# Altium PCB OpticalProbeTest.PcbDoc
Units mm, origin at the board's own origin, x right, y up, seen from the top; angles counter-clockwise.
Board outline 50 x 37 mm, 2 copper layers (Top Layer, Bottom Layer); 35 components, 18 nets, 103 pads, 27 vias.
Unrouted connection lines stored in the file: 3.
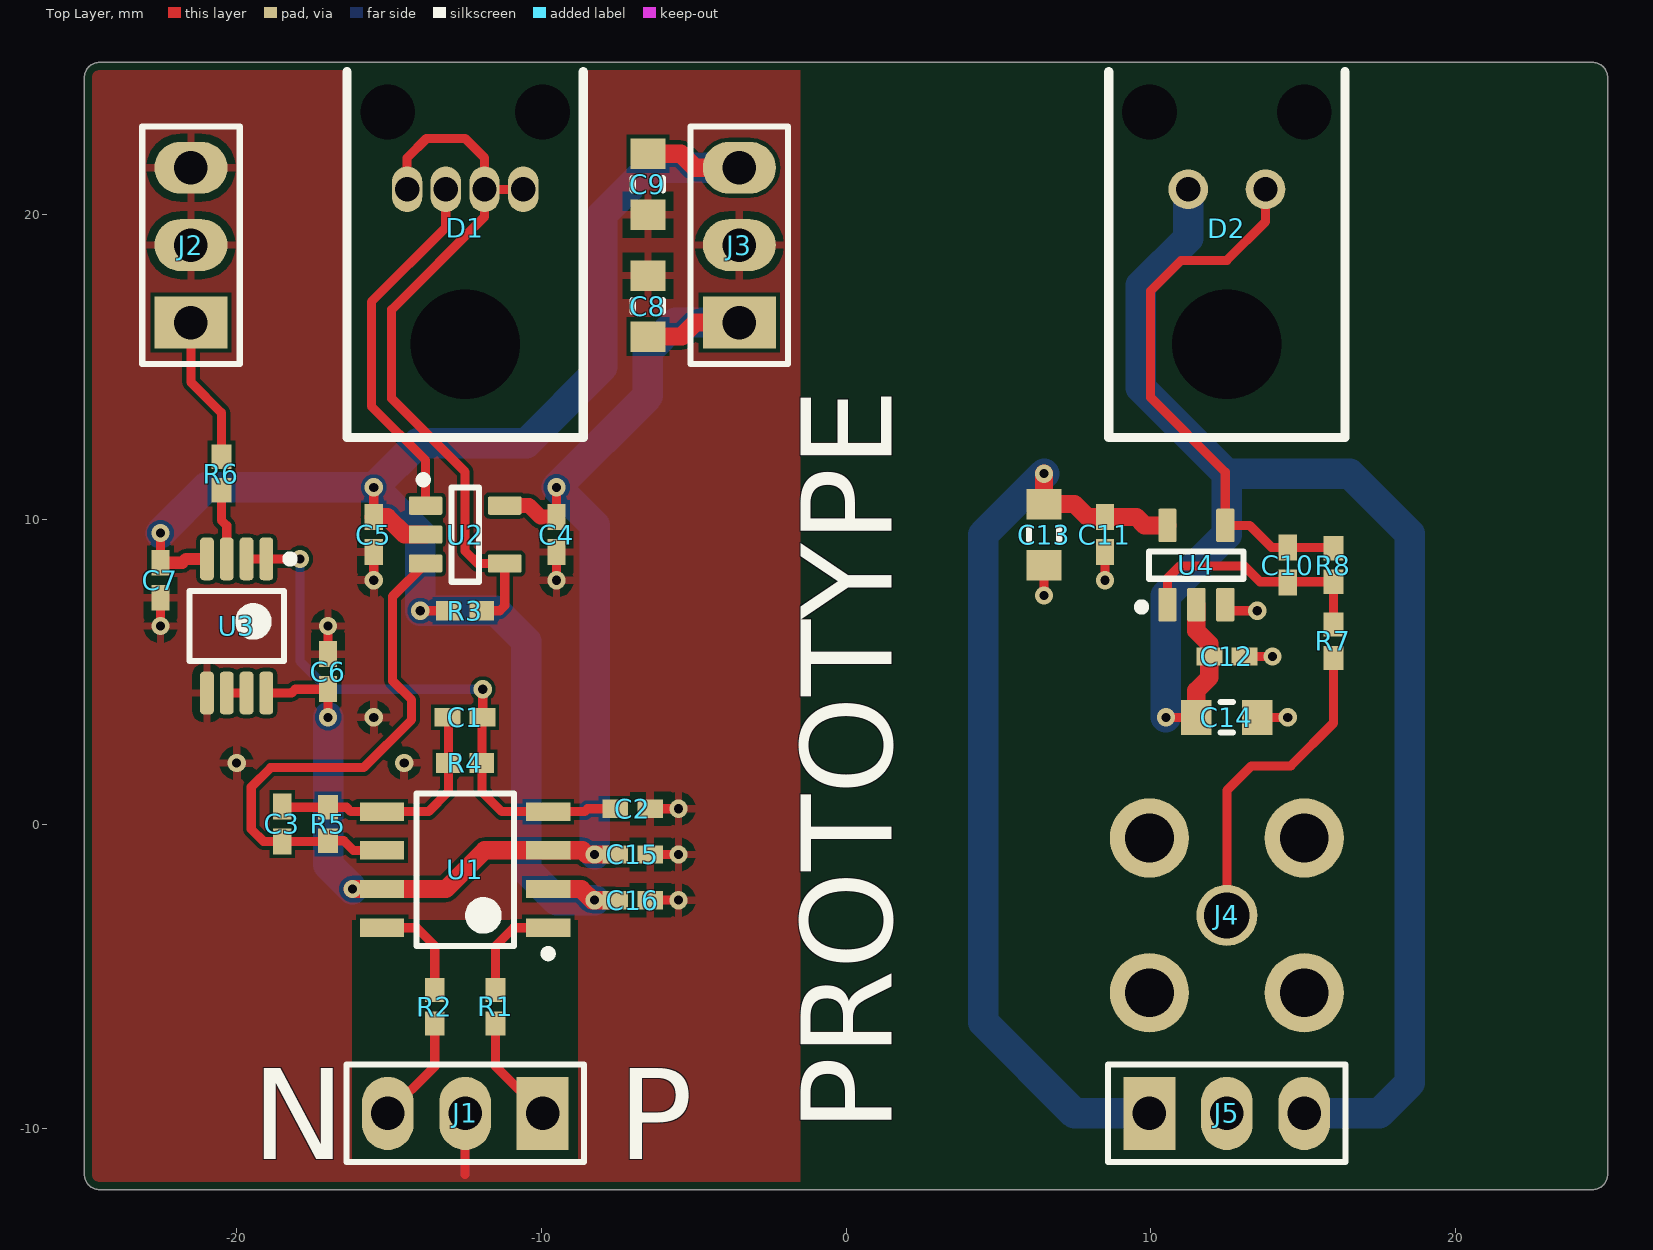
[diagram p0: Top Layer view]
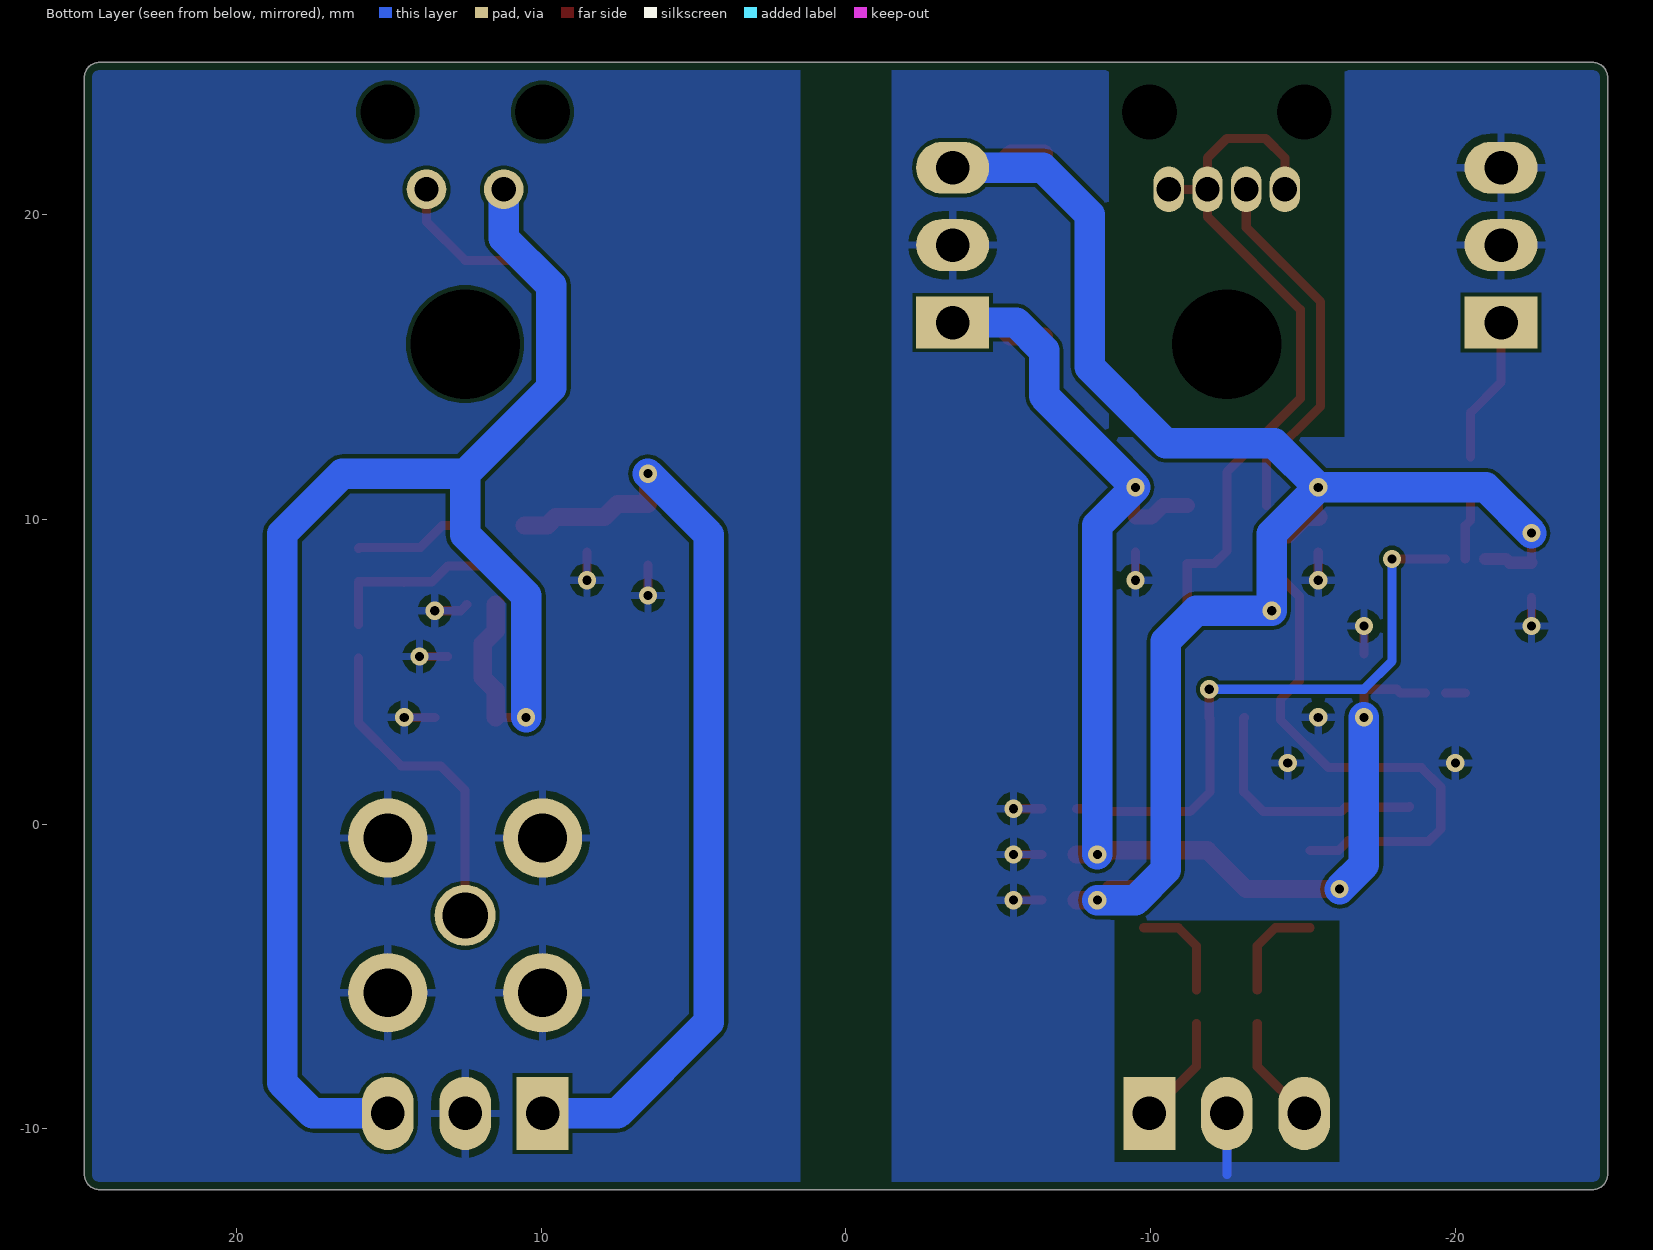
[diagram p1: Bottom Layer view, seen from below]

## Layer stack, top to bottom
Top Solder: solder mask 0.0102, Solder Resist, Dk 3.5
Top Layer: signal copper 0.0356
Dielectric 1: dielectric 0.32, FR-4, Dk 4.8
Bottom Layer: signal copper 0.0356
Bottom Solder: solder mask 0.0102, Solder Resist, Dk 3.5

## Board outline
-25,-11.5 ccw(c-24.5,-11.5) -24.5,-12 24.5,-12 ccw(c24.5,-11.5) 25,-11.5 25,24.5 ccw(c24.5,24.5) 24.5,25 -24.5,25 ccw(c-24.5,24.5) -25,24.5

## Design rules (kind name [scope] priority, off if disabled: settings)
BoardOutlineClearance [All] p1: gap=0.254 ignorepadtopadclearanceinfootprint=FALSE except(0: Arc-SplitContinuation Track-SplitContinuation SMDPad-SplitContinuation THPad-SplitContinuation Via-SplitContinuation Fill-SplitContinuation Poly-SplitContinuation Region-SplitContinuation Text-SplitContinuation)
Clearance [All] p1: gap=0.127 ignorepadtopadclearanceinfootprint=FALSE
HoleSize [All] p1: absolutevalues=TRUE maxlimit=6 minlimit=0.025 maxpercent=80.000 minpercent=20.000
PolygonConnect [All] p1: connectstyle=Relief reliefconductorwidth=0.254 reliefentries=4 polygonreliefangle="90 Angle" airgapwidth=0.254
RoutingVias [All] p1: holewidth=0.711 width=1.27 viastyle="Through Hole" minholewidth=0.711 minwidth=1.27 maxholewidth=0.711 maxwidth=1.27
SolderMaskExpansion [All] p1: expansion=0.102 istentingtop=FALSE
Width [All] p1: maxlimit=2.54 minlimit=0.254 preferedwidth=0.254 minimp=50.000000 maximp=50.000000 favimp=50.000000
29 further rules are at their usual default settings.

## Components (designator, comment, footprint, x,y, rotation, side; value= is the part's Value field where it differs from the comment)
C1 "18p" CAPC1005X06N -12.5,3.5 r180 top
C2 "100n" CAPC1005X06N -7,0.5 r180 top
C3 "1.2p" CAPC1005X06N -18.5,0 r90 top
C4 "100n" CAPC1005X06N -9.5,9.5 r90 top
C5 "100n" CAPC1005X06N -15.5,9.5 r90 top
C6 "100n" CAPC1005X06N -17,5 r270 top
C7 "100n" CAPC1005X06N -22.5,8 r90 top
C8 "100n" CAPC_0805 -6.5,17 r270 top
C9 "100n" CAPC_0805 -6.5,21 r90 top
C10 "1.2p" CAPC1005X06N 14.5,8.5 r90 top
C11 "100n" CAPC1005X06N 8.5,9.5 r90 top
C12 "100n" CAPC1005X06N 12.5,5.5 r180 top
C13 "100n" CAPC_0805 6.5,9.5 r90 top
C14 "100n" CAPC_0805 12.5,3.5 r180 top
C15 "100n" CAPC1005X06N -7,-1 r180 top
C16 "100n" CAPC1005X06N -7,-2.5 r180 top
D1 "IF-E99B" INDUSTRIALFIBEROPTICS_IF-E99B -12.5,20.83 r0 top
D2 "IF D91B" INDUSTRIALFIBEROPTICS_IF-D91B 12.5,20.83 r0 top
J1 "61300311121" WURTH_61300311121 -12.5,-9.5 r180 top
J2 "61300311121" WURTH_61300311121 -21.5,19 r90 top
J3 "61300311121" WURTH_61300311121 -3.5,19 r90 top
J4 "5-1814832-2" TE_5-1814832-2 12.5,-3 r0 top
J5 "61300311121" WURTH_61300311121 12.5,-9.5 r0 top
R1 "10R" RESC1005X04N -11.5,-6 r90 top
R2 "10R" RESC1005X04N -13.5,-6 r90 top
R3 "220R" RESC1005X04N -12.5,7 r0 top
R4 "220R" RESC1005X04N -12.5,2 r180 top
R5 "2k2,0.1%" RESC1005X04N -17,0 r270 top
R6 "0R" RESC1005X04N -20.5,11.5 r270 top
R7 "49R9,1%,0.063W,0402" RESC1005X04N 16,6 r270 top value=49R9
R8 "2k2,0.1%" RESC1005X04N 16,8.5 r270 top
U1 "AD8129ARZ" ANALOGDEVICES_PKG_R-8 -12.5,-1.5 r180 top
U2 "OPA659IDBVT" TEXASINSTRUMENTS_PKG_DBV0005A -12.5,9.5 r0 top
U3 "LM7332MMX/NOPB" TEXASINSTRUMENTS_PKG_DGK0008A -20,6.5 r270 top
U4 "OPA659IDBVT" TEXASINSTRUMENTS_PKG_DBV0005A 11.5,8.5 r90 top

## Footprints (in the part's own frame and the unit in brackets; to place one, negate y for a bottom-side part, rotate by r counter-clockwise, add the part's x,y. Pads: shape width x height; smd on the part's side, far side on the other; paste and mask are expansions set on the pad)
ANALOGDEVICES_PKG_R-8 [mm]
  rect 1.45x0.6 smd: 1(-2.725,1.905) 2(-2.725,0.635) 3(-2.725,-0.635) 4(-2.725,-1.905) 5(2.725,-1.905) 6(2.725,-0.635) 7(2.725,0.635) 8(2.725,1.905)
  silkscreen extent -2.85,-2.5 1.6,2.88, body extent -2,-2.5 2,2.5, height 1.75
CAPC1005X06N [mm] "Chip Capacitor, 2-Leads, Body 1.0x0.5mm, IPC Medium Density"
  rect 0.85x0.6 smd: 1(-0.575,0) 2(0.575,0)
  body extent -0.53,-0.28 0.53,0.28, height 0.55
CAPC_0805 [mm] "CAPC_0805"
  rect 1x1.15 smd: 1(-1,0) 2(1,0)
  silkscreen extent -0.2,-0.5 0.2,0.5, body extent -1,-0.5 1,0.5, height 1.2
INDUSTRIALFIBEROPTICS_IF-D91B [mm]
  round 1.3 hole 0.8 mask+0: 1(-1.27,0) 2(1.27,0)
  round 0 hole 1.8 unplated mask+0: ""(-2.54,2.54) ""(2.54,2.54)
  round 0 hole 3.6 unplated mask+0: ""(0,-5.08)
  silkscreen extent -3.87,-8.14 3.87,3.86, body extent -4.31,-8.31 4.31,19.44, height 11.3
INDUSTRIALFIBEROPTICS_IF-E99B [mm]
  oval 1x1.5 hole 0.8 mask+0: 1(1.905,0) 2(0.635,0) 3(-0.635,0) 4(-1.905,0)
  round 0 hole 1.8 unplated mask+0: ""(-2.54,2.54) ""(2.54,2.54)
  round 0 hole 3.6 unplated mask+0: ""(0,-5.08)
  silkscreen extent -3.87,-8.14 3.87,3.86, body extent -4.32,-8.31 4.32,19.44, height 11.3
RESC1005X04N [mm] "Chip Resistor, 2-Leads, Body 1.0x0.5mm, IPC Medium Density"
  rect 0.8x0.65 smd: 1(-0.55,0) 2(0.55,0)
  body extent -0.52,-0.27 0.53,0.28, height 0.4
TE_5-1814832-2 [mm] "TE_5-1814832-2"
  round 2 hole 1.5: 1(0,0)
  round 2.6 hole 1.6: 2(-2.54,-2.54) 2(-2.54,2.54) 2(2.54,-2.54) 2(2.54,2.54)
  body extent -3.16,-3.19 3.24,3.21, height 11
TEXASINSTRUMENTS_PKG_DBV0005A [mm] "SOT23, 5-Leads, Body 2.90x2.80mm, Pitch 0.95mm"
  rrect17% 1.1x0.6 smd mask+0.07: 1(-1.3,0.95) 2(-1.3,0) 3(-1.3,-0.95) 4(1.3,-0.95) 5(1.3,0.95)
  silkscreen extent -1.5,-1.55 0.45,1.92, body extent -1.4,-1.45 1.4,1.45, height 1.2
TEXASINSTRUMENTS_PKG_DGK0008A [mm]
  rrect50% 1.4x0.45 smd: 1(-2.2,0.975) 2(-2.2,0.325) 3(-2.2,-0.325) 4(-2.2,-0.975) 5(2.2,-0.975) 6(2.2,-0.325) 7(2.2,0.325) 8(2.2,0.975)
  silkscreen extent -2.32,-1.55 1.15,1.87, body extent -2.45,-1.55 2.45,1.55, height 1.1
WURTH_61300311121 [mm] "WURTH_61300311121"
  rect 1.7x2.4 hole 1.1 mask+0.05: 1(-2.54,0)
  oval 1.7x2.4 hole 1.1 mask+0.05: 2(0,0) 3(2.54,0)
  silkscreen extent -3.9,-1.6 3.9,1.6, body extent -3.81,-1.27 3.81,1.27, height 8.57

## Part data
C1: library part CAP,Cer,18pF,25VDC,C0G,0402, "18 pF ï¿½5% 25V Ceramic Capacitor C0G, NP0 0402 (1005 Metric)", Manufacturer 1="Walsin Technology Corporation", Manufacturer 1 Part Number=0402N180J250CT, Vendor 1 Part Number=1292-1265-1-ND, CreatedBy="Judd Foster", HelpURL=http://www.passivecomponent.com/wp-content/uploads/2018/10/MLCC.pdf, Part Name=CAP,Cer,18pF,25VDC,C0G,0402, Vendor 1=Digikey
C2 C4 C5 C6 C7 C11 C12 C15 C16: library part CAP,Cer,100nF,25VDC,X7R,0402, "0.1ï¿½F ï¿½10% 25V Ceramic Capacitor X7R 0402 (1005 Metric)", Manufacturer 1="Murata Electronics", Manufacturer 1 Part Number=GRM155R71E104KE14J, Vendor 1 Part Number=490-14603-1-ND, CreatedBy="Judd Foster", HelpURL=https://search.murata.co.jp/Ceramy/image/img/A01X/G101/ENG/GRM155R71E104KE14-01.pdf, Part Name=CAP,Cer,100nF,25VDC,X7R,0402, Vendor 1=Digikey
C3 C10: library part CAP,Cer,1.2pF,50V,C0G,0402, "1.2 pF ï¿½0.1pF 50V Ceramic Capacitor C0G, NP0 0402 (1005 Metric)", Manufacturer 1="Murata Electronics", Manufacturer 1 Part Number=GRM1555C1H1R2BA01D, Vendor 1 Part Number=490-6209-1-ND, CreatedBy="Judd Foster", HelpURL=https://search.murata.co.jp/Ceramy/image/img/A01X/G101/ENG/GRM1555C1H1R2BA01-01.pdf, Part Name=CAP,Cer,1.2pF,50V,C0G,0402, Vendor 1=Digikey
C8 C9 C13 C14: library part CAP,Cer,100nF,50VDC,X7R,0805, "CAP CER 0.1UF 50V X7R 0805", Manufacturer 1=KEMET, Manufacturer 1 Part Number=C0805C104M5RACTU, Vendor 1 Part Number=399-1169-1-ND, CreatedBy="Judd Foster", HelpURL=https://content.kemet.com/datasheets/KEM_C1002_X7R_SMD.pdf, Part Name=CAP,Cer,100nF,50VDC,X7R,0805, Vendor 1=Digikey
D1: library part "XMITTER,FIBER OPTIC,650NM,1.9V,IF-E99B", "Fiber Optic Transmitter 650nm 1.9V 50 mA Connector-less", Manufacturer 1="Industrial Fiber Optics", Vendor 1 Part Number=FB161-ND, CreatedBy="Judd Foster", HelpURL=https://i-fiberoptics.com/pdf/if-e99bdatasheet.pdf, Manufacturer 1 Part Number=IF-E99B, Part Name="XMITTER,FIBER OPTIC,650NM,1.9V,IF-E99B", Vendor 1=DigiKey
D2: library part "RECEIVER,FIBER OPTIC,450-1050NM,IF-D91B", "Fiber Optic Receiver General Purpose 100Mbps", Manufacturer 1="Industrial Fiber Optics", Vendor 1 Part Number=FB200-ND, CreatedBy="Judd Foster", HelpURL=https://i-fiberoptics.com/pdf/ifd91b-1809.pdf, Manufacturer 1 Part Number="IF D91B", Part Name="RECEIVER,FIBER OPTIC,450-1050NM,IF-D91B", Vendor 1=DigiKey
J1 J2 J3 J5: library part "Term,Header,3 Pin,Top,2.54mm", "CONN HEADER VERT 3POS 2.54MM", Manufacturer 1="Wï¿½rth Elektronik", Vendor 1 Part Number=732-5316-ND, CreatedBy="Judd Foster", HelpURL=https://katalog.we-online.de/em/datasheet/6130xx11121.pdf, Manufacturer 1 Part Number=61300311121, Part Name="Term,Header,3 Pin,Top,2.54mm", Vendor 1=Digikey
J4: library part Conn,RF,SMA,Fem,50R,Thru, "SMA Connector Jack, Female Socket 50Ohm Through Hole Solder", Manufacturer 1="TE Connectivity", Vendor 1 Part Number=C482015, CreatedBy="Judd Foster", HelpURL=https://datasheet.lcsc.com/lcsc/2003251910_TE-Connectivity-5-1814832-2_C482015.pdf, Manufacturer 1 Part Number=5-1814832-2, Part Name=Conn,RF,SMA,Fem,50R,Thru, Vendor 1=LCSC
R1 R2: library part RES,10R,1%,0.063W,0402, "10 Ohms ï¿½1% 0.063W, 1/16W Chip Resistor 0402 (1005 Metric) Automotive AEC-Q200 Thick Film", Manufacturer 1="Panasonic Electronic Components", Manufacturer 1 Part Number=ERJ-2RKF10R0X, Vendor 1 Part Number=P10.0LCT-ND, CreatedBy="Judd Foster", HelpURL=https://industrial.panasonic.com/cdbs/www-data/pdf/RDA0000/AOA0000C304.pdf, Part Name=RES,10R,1%,0.063W,0402, Vendor 1=Digikey
R3 R4: library part RES,220R,1%,0.063W,0402, "220 Ohms ï¿½1% 0.063W, 1/16W Chip Resistor 0402 (1005 Metric) Moisture Resistant Thick Film", Manufacturer 1=Yageo, Manufacturer 1 Part Number=RC0402FR-07220RL, Vendor 1 Part Number=311-220LRCT-ND, CreatedBy="Judd Foster", HelpURL=https://www.yageo.com/upload/media/product/productsearch/datasheet/rchip/PYu-RC_Group_51_RoHS_L_12.pdf, Part Name=RES,220R,1%,0.063W,0402, Vendor 1=Digikey
R5 R8: library part RES,2k2,0.1%,0.063W,0402, "2.2 kOhms ï¿½0.1% 0.063W, 1/16W Chip Resistor 0402 (1005 Metric) Anti-Sulfur, Automotive AEC-Q200 Thin Film", Manufacturer 1=Susumu, Manufacturer 1 Part Number=RG1005P-222-B-T5, Vendor 1 Part Number=RG10P2.2KBCT-ND, CreatedBy="Judd Foster", HelpURL=https://www.susumu.co.jp/common/pdf/n_catalog_partition01_en.pdf, Part Name=RES,2k2,0.1%,0.063W,0402, Vendor 1=Digikey
R6: library part RES,0R0,0.1W,0402, "0 Ohms Jumper 0.1W, 1/10W Chip Resistor 0402 (1005 Metric) Automotive AEC-Q200 Thick Film", Manufacturer 1="Panasonic Electronic Components", Manufacturer 1 Part Number=ERJ-2GE0R00X, Vendor 1 Part Number=P0.0JCT-ND, CreatedBy="Judd Foster", HelpURL=https://industrial.panasonic.com/cdbs/www-data/pdf/RDA0000/AOA0000C301.pdf, Part Name=RES,0R0,0.1W,0402, Vendor 1=Digikey
R7: library part RES,49R9,1%,0.063W,0402, "49.9 Ohms Â±1% 0.063W, 1/16W Chip Resistor 0402 (1005 Metric) Moisture Resistant Thick Film", Manufacturer 1=YAGEO, Manufacturer 1 Part Number=RC0402FR-0749R9L, Vendor 1 Part Number=311-49.9LRCT-ND, CreatedBy="Judd Foster", HelpURL=https://www.yageo.com/upload/media/product/products/datasheet/rchip/PYu-RC_Group_51_RoHS_L_12.pdf, Part Name=RES,49R9,1%,0.063W,0402, Vendor 1=DigiKey
U1: "Differential Amplifier 1 Circuit 8-SOIC", Manufacturer 1="Analog Devices Inc.", Vendor 1 Part Number=505-AD8129ARZ-ND, CreatedBy="Judd Foster", HelpURL=https://www.analog.com/media/en/technical-documentation/data-sheets/AD8129_8130.pdf, Manufacturer 1 Part Number=AD8129ARZ, Part Name=AD8129ARZ, Vendor 1=DigiKey
U2 U4: "J-FET Amplifier 1 Circuit SOT-23-5", Manufacturer 1="Texas Instruments", Vendor 1 Part Number=296-24971-1-ND, CreatedBy="Judd Foster", HelpURL=https://www.ti.com/lit/ds/symlink/opa659.pdf?HQS=dis-dk-null-digikeymode-dsf-pf-null-wwe&ts=1730770701398&ref_url=https%253A%252F%252Fwww.ti.com%252Fgeneral%252Fdocs%252Fsuppproductinfo.tsp%253FdistId%253D10%2526gotoUrl%253Dhttps%253A%252F%252Fwww.ti.com%, Manufacturer 1 Part Number=OPA659IDBVT, Part Name=OPA659IDBVT, Vendor 1=DigiKey
U3: library part LM7332MMX_NOPB, "General Purpose Amplifier 2 Circuit Rail-to-Rail 8-VSSOP", Manufacturer 1="Texas Instruments", Vendor 1 Part Number=296-LM7332MMX/NOPBCT-ND, CreatedBy="Judd Foster", HelpURL=https://www.ti.com/lit/ds/symlink/lm7332.pdf?HQS=dis-dk-null-digikeymode-dsf-pf-null-wwe&ts=1730932081789&ref_url=https%253A%252F%252Fwww.ti.com%252Fgeneral%252Fdocs%252Fsuppproductinfo.tsp%253FdistId%253D10%2526gotoUrl%253Dhttps%253A%252F%252Fwww.ti.com%, Manufacturer 1 Part Number=LM7332MMX/NOPB, Part Name=LM7332MMX_NOPB, Vendor 1=DigiKey

## Via types
v1: diameter 0.6, hole 0.3, Top Layer to Bottom Layer, 27 vias

## Nets (pads, with @x,y where several pads share a name; then routed paths per layer and width w, separated by ;. In a path a pad name is that pad's centre, name@x,y a point inside that pad or via, vN(x,y) a via of type N, cw(c..) or ccw(c..) an arc to the next point about the centre after c; other vN are vias at no path point)
COM: C2.1 C4.1 C5.1 C6.1 C7.1 C8.1 C9.1 C11.1 C12.1 C13.1 C14.1 C15.1 C16.1 J1.2 J2.2 J2.3 J3.2 J4.2 J5.2 U3.5 U4.3 | length 15.5
  Top Layer w0.3: v1(-22.5,6.5) C7.1 ; C6.1 v1(-17,6.5) ; v1(-15.5,8) C5.1 ; -12.5,-11.5 J1.2 ; v1(-9.5,8) C4.1 ; C16.1 v1(-5.5,-2.5) ; C15.1 v1(-5.5,-1) ; C2.1 v1(-5.5,0.5) ; v1(6.5,7.5) C13.1 ; v1(8.5,8) C11.1 ; U4.3 12.65,7 v1(13.5,7) ; C12.1 v1(14,5.5) ; C14.1 v1(14.5,3.5)
  Bottom Layer w0.3: -12.5,-11.5 J1.2
  other v1: -20,2 -14.5,2 -15.5,3.5
IN_N: J1.3 R2.1 | length 3.6
  Top Layer w0.3: J1.3 -13.5,-7.96 R2.1
IN_P: J1.1 R1.1 | length 3.6
  Top Layer w0.3: R1.1 -11.5,-7.96 J1.1
NetC1_2: C1.2 C3.2 R4.2 R5.1 U1.5 | length 8.2
  Top Layer w0.3: C3.2 -18.475,0.55 R5.1 -16.396,0.55 -16.251,0.405 U1.5 -13.705,0.405 -13.05,1.06 -13.05,3.475 C1.2
NetC3_1: C3.1 R5.2 U1.6 U2.3 | length 18
  Top Layer w0.3: U1.6 -16.169,-0.865 -16.484,-0.55 R5.2 -17.025,-0.575 C3.1 -19.114,-0.575 -19.521,-0.169 -19.521,1.213 -18.884,1.849 -15.836,1.849 -14.259,3.426 -14.259,4.074 -14.883,4.698 -14.883,7.467 U2.3
NetC10_1: C10.1 R7.1 R8.2 U4.1 | length 8.1
  Top Layer w0.3: U4.1 10.55,8.058 10.959,8.466 13.072,8.466 13.589,7.95 C10.1@14.525,7.95 ; C10.1 C10.1@14.525,7.95 ; R7.1 R8.2 C10.1@14.525,7.95
NetC10_2: C10.2 D2.2 R8.1 U4.4 | length 18.3
  Top Layer w0.3: D2.2 13.77,19.77 12.5,18.5 11,18.5 10,17.5 10,14 12.45,11.55 U4.4 13.245,9.8 13.97,9.075 C10.2 15.975,9.075 R8.1
NetD1_1: D1.1 D1.2 D1.4 R3.2 U2.4 | length 24.2
  Top Layer w0.3: D1.4 -14.405,21.865 -13.77,22.5 -12.5,22.5 -11.865,21.865 D1.2 ; R3.2 -11.367,7 -11.2,7.167 U2.4 -12.092,8.55 -12.5,8.958 -12.5,11.552 -14.914,13.966 -14.914,16.883 -11.865,19.932 D1.2 ; D1.1 D1.2
NetD1_3: D1.3 U2.1 | length 12.1
  Top Layer w0.3: U2.1 -13.8,11.937 -15.577,13.714 -15.577,17.137 -13.135,19.579 D1.3
NetJ2_1: J2.1 R6.1 | length 4.8
  Top Layer w0.3: J2.1 -21.5,14.5 -20.5,13.5 R6.1
NetJ4_1: J4.1 R7.2 | length 10.7
  Top Layer w0.3: J4.1 12.5,1.099 13.31,1.909 14.596,1.909 16,3.314 R7.2
NetR1_2: R1.2 U1.1 | length 3.4
  Top Layer w0.3: R1.2 -11.5,-4 -10.905,-3.405 U1.1
NetR2_2: R2.2 U1.8 | length 3.4
  Top Layer w0.3: U1.8 -14.095,-3.405 -13.5,-4 R2.2
NetR6_2: R6.2 U3.3 | length 2.3
  Top Layer w0.3: R6.2 -20.5,9.968 -20.325,9.793 U3.3
NetU3_6: U3.6 U3.7 | length 0.7
  Top Layer w0.3: U3.6 U3.7
REF: C1.1 C2.2 R4.1 U1.4 U3.1 U3.2 | length 19.5
  Top Layer w0.3: U3.2 U3.1 v1(-17.923,8.7) ; v1(-11.925,4.425) C1.1 -11.95,3.475 R4.1 -11.95,1.06 -11.295,0.405 U1.4 -8.576,0.405 -8.481,0.5 C2.2
  Bottom Layer w0.3: v1(-17.923,8.7) -17.923,5.348 -17,4.425 v1(-11.925,4.425)
VCC: C4.2 C6.2 C8.2 C11.2 C13.2 C15.2 J3.1 J5.1 U1.3 U1.7 U2.5 U3.8 U4.5 | length 76.7
  Top Layer w0.3: U3.8 -18.2,4.3 -18.075,4.425 C6.2 v1(-17,3.5) ; C4.2@-9.5,10.125 v1(-9.5,11.05)
  Top Layer w0.5: U2.5 -10.404,10.45 -10.029,10.075 C4.2
  Top Layer w0.6: v1(-16.2,-2.135) U1.7@-15.275,-2.135 ; U1.7 -13.135,-2.135 -11.865,-0.865 U1.3 -8.652,-0.865 -8.517,-1 v1(-8.25,-1) C15.2 ; C8.2 -5.393,16 -4.933,16.46 J3.1 ; v1(6.5,11.5) C13.2 7.5,10.5 7.925,10.075 C11.2 9.53,10.075 9.805,9.8 U4.5
  Bottom Layer w1: v1(-17,3.5) -17,-1.335 v1(-16.2,-2.135) ; v1(-8.25,-1) -8.25,9.8 v1(-9.5,11.05) -6.5,14.05 -6.5,15.544 -5.584,16.46 J3.1 ; v1(6.5,11.5) 4.5,9.5 4.5,-6.5 7.5,-9.5 J5.1
VEE: C5.2 C7.2 C9.2 C12.2 C14.2 C16.2 D2.1 J3.3 J5.3 R3.1 U1.2 U2.2 U3.4 U4.2 | length 111.2
  Top Layer w0.3: C7.2@-22.5,8.625 v1(-22.5,9.55) ; C5.2@-15.5,10.125 v1(-15.5,11.05) ; v1(-13.975,7) R3.1 ; v1(10.5,3.5) C14.2
  Top Layer w0.4: C7.2 -21.787,8.575 -21.662,8.7 U3.4
  Top Layer w0.6: C5.2 -15.059,10.075 -14.484,9.5 U2.2 ; U1.2 -8.694,-2.135 -8.329,-2.5 v1(-8.25,-2.5) C16.2 ; C9.2 -5.42,22 -4.96,21.54 J3.3 ; C14.2 11.5,4.381 11.925,4.806 C12.2 11.925,5.914 11.5,6.339 U4.2
  Bottom Layer w1: v1(-22.5,9.55) -21,11.05 v1(-15.5,11.05) ; v1(-8.25,-2.5) -9.5,-2.5 -10.5,-1.5 -10.5,6 -11.5,7 v1(-13.975,7) -13.975,9.525 v1(-15.5,11.05) ; J3.3 -6.46,21.54 -8,20 -8,15 -10.5,12.5 -14.05,12.5 v1(-15.5,11.05) ; v1(10.5,3.5) 10.5,7.5 12.5,9.5 12.5,11.5 ; D2.1 11.23,19.23 9.677,17.677 9.677,14.323 12.5,11.5 ; J5.3 17.5,-9.5 18.5,-8.5 18.5,9.531 16.531,11.5 12.5,11.5
pads on no net: D1. D2.

## Polygon pours and split planes (outlines as drawn)
COM on Top Layer "NONET_L-01_P-001" (solid, remove dead copper, pour order 0): -1.5,-12 -1.5,25 -25,25 -25,-12
COM on Bottom Layer "NONET_L-01_P-001" (solid, remove dead copper, pour order 2): 1.5,-12 1.5,25 25,25 25,-12
COM on Bottom Layer "NONET_L-01_P-001" (solid, remove dead copper, pour order 1): -1.5,-12 -1.5,25 -25,25 -25,-12

## Other copper
Top Layer:
  pour cut-out: -8.8,-3.153 -16.2,-3.153 -16.2,-11.1 -8.8,-11.1
  pour cut-out: -16.375,12.69 -8.625,12.69 -8.625,24.69 -16.375,24.69
Bottom Layer:
  pour cut-out: -8.8,-3.153 -16.2,-3.153 -16.2,-11.1 -8.8,-11.1
  pour cut-out: -16.375,12.69 -8.625,12.69 -8.625,24.69 -16.375,24.69

## Silkscreen, mask and mechanical layers (free items; w line width, h text height)
Top Overlay:
  text "PROTOTYPE" at 1.5,-10.112 h3 r90
  text "N" at -19.5,-11 h3
  text "P" at -7.5,-11 h3
Board:
  the board outline again, w0.1

## Text inside footprints (layer, text, board x,y; h text height)
D1: Top Courtyard (Mech15) "PCB EDGE" at -14.2,25.05 h0.5
D2: Top Courtyard (Mech15) "PCB EDGE" at 10.8,25.05 h0.5